# Altium PCB MATRIX-x4.PcbDoc
Units mil, origin at the board's own origin, x right, y up, seen from the top; angles counter-clockwise.
Board outline 5538 x 1391 mil, 2 copper layers (Top Layer, Bottom Layer); 23 components, 78 nets, 209 pads, 35 vias.
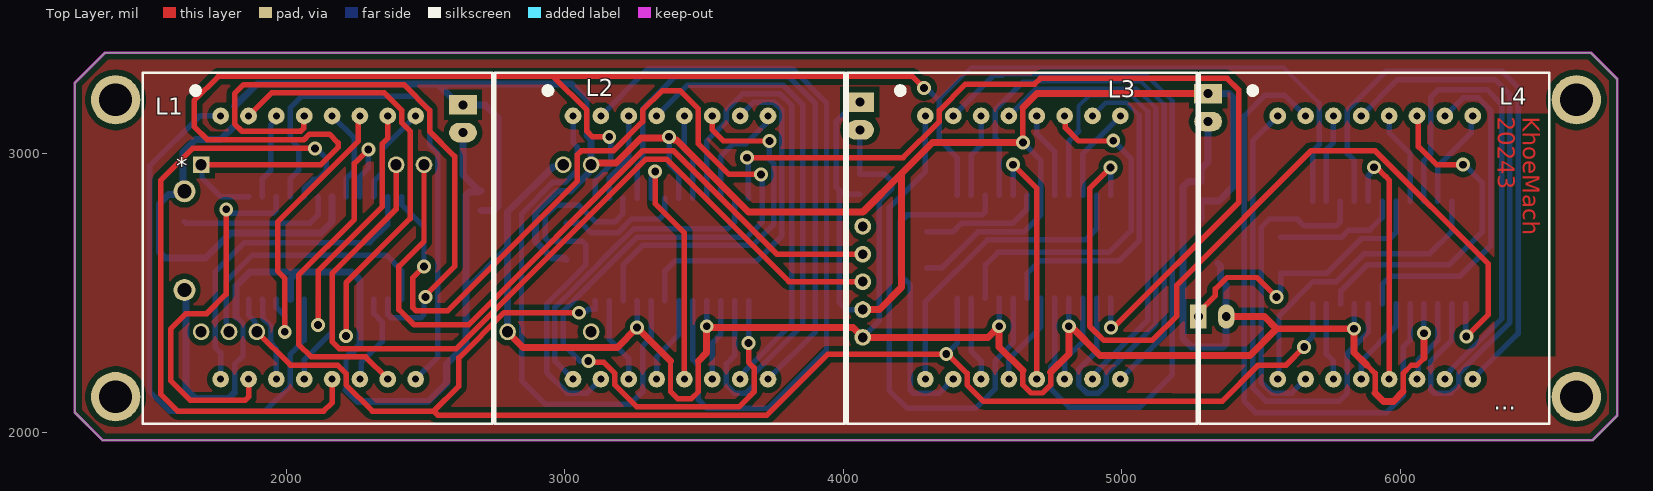
[diagram p0: Top Layer view]
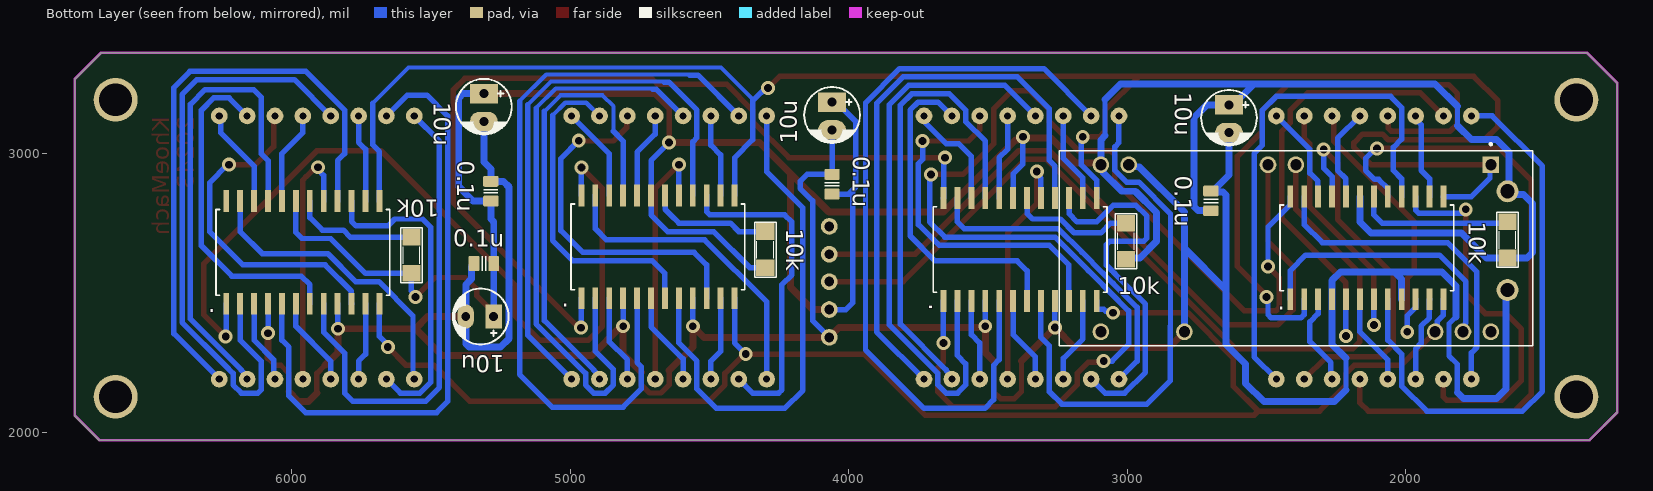
[diagram p1: Bottom Layer view, seen from below]
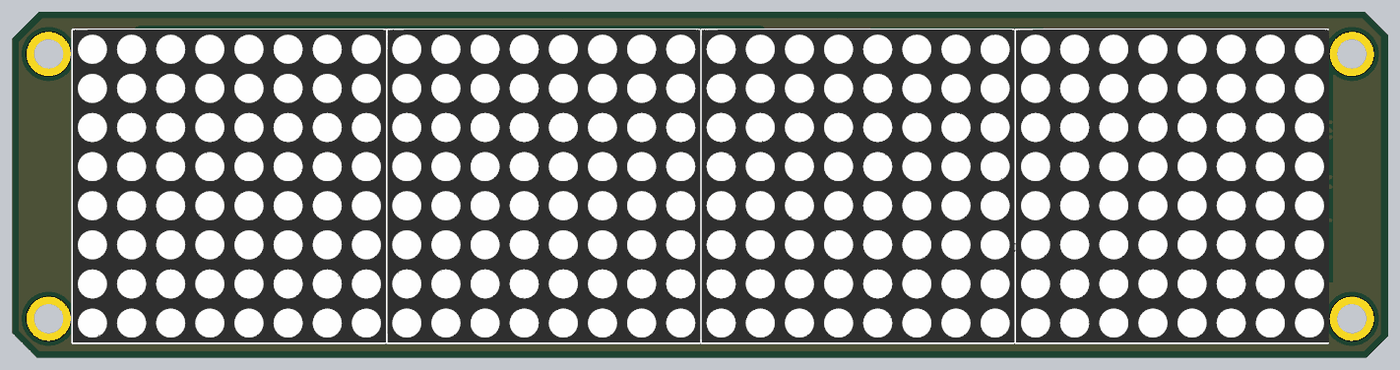
[diagram p2: 3D render of the assembled board from above, using the file's embedded part models]
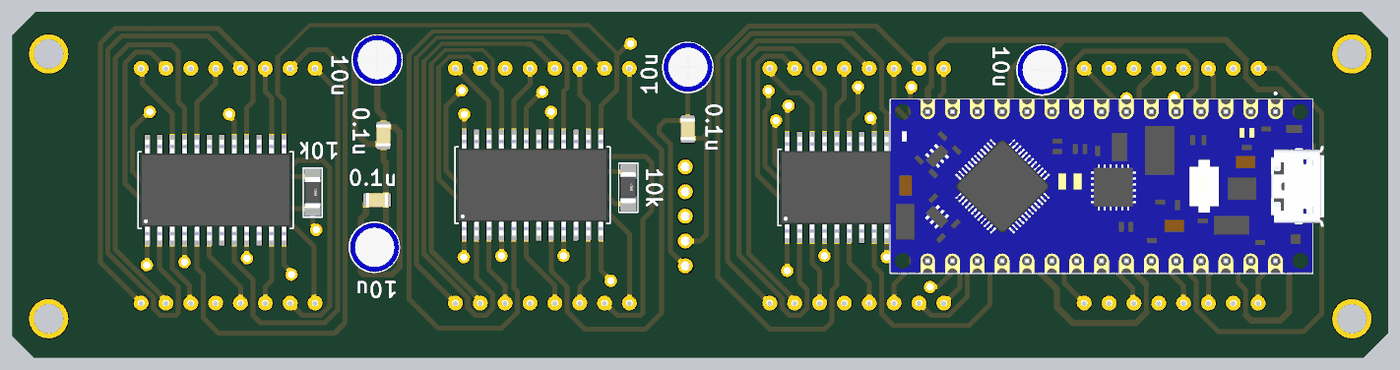
[diagram p3: 3D render of the assembled board from below, using the file's embedded part models]

## Layer stack, top to bottom
Top Solder: solder mask 0.4, Solder Resist, Dk 3.5
Top Layer: signal copper 1.4
Dielectric 1: dielectric 12.6, FR-4, Dk 4.8
Bottom Layer: signal copper 1.4
Bottom Solder: solder mask 0.4, Solder Resist, Dk 3.5

## Board outline
1341,1971 1241,2071 1241,3253 1350,3362 6684,3362 6779,3267 6779,2059 6691,1971

## Design rules (kind name [scope] priority, off if disabled: settings)
Clearance [All] p1: gap=10 ignorepadtopadclearanceinfootprint=FALSE except(20: Arc-Fill Arc-Poly Arc-Region Track-Fill Track-Poly Track-Region SMDPad-Fill SMDPad-Poly SMDPad-Region THPad-Fill THPad-Poly THPad-Region Via-Fill Via-Poly Via-Region Fill-Fill Fill-Poly Fill-Region Poly-Poly Poly-Region Region-Region)
PolygonConnect [All] p1: connectstyle=Relief reliefconductorwidth=10 reliefentries=4 polygonreliefangle="90 Angle" airgapwidth=10
RoutingVias [All] p1: holewidth=28 width=50 viastyle="Through Hole" minholewidth=19.68 minwidth=50 maxholewidth=28 maxwidth=50
SilkToSolderMaskClearance [IsText] p1: minsilkscreentomaskgap=10 clearancetoexposedcopper=TRUE
SolderMaskExpansion [All] p1: expansion=4 istentingtop=FALSE
Width [All] p1: maxlimit=39.37 minlimit=10 preferedwidth=19.68
29 further rules are at their usual default settings.

## Classes and differential pairs
component class MATRIX-x1: 0.1u 10k 10u * . L1 L2 L3 L4

## Components (designator, comment, footprint, x,y, rotation, side; value= is the part's Value field where it differs from the comment)
0.1u "approved sub OK" CAPC2012X135N 5285,2865 r90 bottom value=0.1uF (schematic designator C8)
0.1u "approved sub OK" CAPC2012X135N 5310,2605 r0 bottom value=0.1uF (schematic designator C6)
0.1u "approved sub OK" CAPC2012X135N 2700,2830 r90 bottom value=0.1uF (schematic designator C4)
0.1u "approved sub OK" CAPC2012X135N 4060,2890 r90 bottom value=0.1uF (schematic designator C2)
10k "10K" SM-RES-1206 4300,2720 r270 bottom value="R1/4W - 1K" (schematic designator R4)
10k "10K" SM-RES-1206 5570,2700 r270 bottom value="R1/4W - 1K" (schematic designator R3)
10k "10K" SM-RES-1206 1635,2755 r270 bottom value="R1/4W - 1K" (schematic designator R2)
10k "10K" SM-RES-1206 3005,2750 r270 bottom value="R1/4W - 1K" (schematic designator R1)
10u "10uF" CP1/2#1 5310,3215 r270 bottom (schematic designator C7)
10u "10uF" CP1/2#2 5275,2415 r0 bottom (schematic designator C5)
10u "10uF" CP1/2#1 2635,3175 r270 bottom (schematic designator C3)
10u "10uF" CP1/2#1 4060,3185 r270 bottom (schematic designator C1)
* "module- mini360" MODULE-MINI360 1930,2685 r0 top
. "MAX7219" MAX7219 5960,2650 r90 bottom (schematic designator M4)
. "MAX7219" MAX7219 4685,2670 r90 bottom (schematic designator M3)
. "MAX7219" MAX7219 3385,2660.5 r90 bottom (schematic designator M2)
. "MAX7219" MAX7219 2140,2666.03 r90 bottom (schematic designator M1)
A1 "ARDUINO-NANO" ARDUINO-NANO 2385,2675 r0 bottom
D1 "DS1307" DS1307-MODULE 4581.81,2576.22 r180 bottom
L1 "LEDMATRIX-8X8" LEDMATRIX_8X8 2095,2670 r0 top
L2 "LEDMATRIX-8X8" LEDMATRIX_8X8 3360,2670.12 r0 top
L3 "LEDMATRIX-8X8" LEDMATRIX_8X8 4625,2670.12 r0 top
L4 "LEDMATRIX-8X8" LEDMATRIX_8X8 5890,2670.12 r0 top

## Footprints (in the part's own frame and the unit in brackets; to place one, negate y for a bottom-side part, rotate by r counter-clockwise, add the part's x,y. Pads: shape width x height; smd on the part's side, far side on the other; paste and mask are expansions set on the pad)
ARDUINO-NANO [mil]
  rect 60x60 / inner round 60 / far side rect 60x60 hole 40: 1(-690,-285)
  round 60 hole 40: 8(10,-285) 9(110,-285) 14(610,-285) 15(710,-285) 16(710,315) 19(410,315) 28(-490,315) 29(-590,315) 30(-690,315)
  silkscreen extent -840,-363 860,365, body extent -885,-335 860,365, height 236
CAPC2012X135N [mm] "Chip Capacitor, Body 2.0x1.2mm, EIA 0805, IPC Medium Density"
  round 0.254 on Mech15: 0(0,0)
  rrect25% 1x1.4 smd: 1(-0.9,0) 2(0.9,0)
  Top Layer pour cut-out: -0.675,0.7 -0.475,0.9 0.475,0.9 0.675,0.7 0.675,-0.7 0.475,-0.9 -0.475,-0.9 -0.675,-0.7
  silkscreen extent -0.15,-0.65 0.15,0.65, body extent -1.1,-0.72 1.1,0.73, height 1.34
CP1/2#1 [mil]
  rect 70x100 hole 32: 1(0,0)
  oval 70x100 hole 32: 2(100,0)
  silkscreen extent -53,-100 146,100, body extent -54,-99 144,100, height 296
CP1/2#2 [mil]
  rect 59.06x86.61 hole 32: 1(0,0)
  oval 59.06x86.61 hole 32: 2(100,0)
  silkscreen extent -53,-100 147,100, body extent -54,-99 144,100, height 296
DS1307-MODULE [mm]
  round 1.524 hole 0.9 mask+0.15: DS(13,4.12) GND(13,-6) SCL(13,1.58) SDA(13,-0.92) VCC(13,-3.46)
LEDMATRIX_8X8 [mil] "3mm"
  round 60 hole 25.59: C1(-30,464.88) C2(-130,-480) C3(-30,-480) C4(270,464.88) C5(170,-480) C6(170,464.88) C7(-230,464.88) C8(-330,464.88) R1(370,464.88) R2(-130,464.88) R3(370,-480) R4(70,464.88) R5(-330,-480) R6(270,-480) R7(-230,-480) R8(70,-480)
  silkscreen extent -610,-640 645,620, body extent -610,-639 650,621, height 239
MAX7219 [mil]
  rect 78x21 smd: 1(-189.5,275) 2(-189.5,225) 3(-189.5,175) 4(-189.5,125) 5(-189.5,75) 6(-189.5,25) 7(-189.5,-25) 8(-189.5,-75) 9(-189.5,-125) 10(-189.5,-175) 11(-189.5,-225) 12(-189.5,-275) 13(179.5,-275) 14(179.5,-225) 15(179.5,-175) 16(179.5,-125) 17(179.5,-75) 18(179.5,-25) 19(179.5,25) 20(179.5,75) 21(179.5,125) 22(179.5,175) 23(179.5,225) 24(179.5,275)
  silkscreen extent -159,-312 149,312, body extent -208,-303 198,303, height 104
MODULE-MINI360 [mm]
  round 2 hole 1.3 mask+0: 3(-7.493,4.555) 4(-7.493,-4.445)
SM-RES-1206 [mil]
  rect 60x65 smd: 1(0,0) 2(130,0)
  silkscreen extent -34,-38 164,39, body extent 2,-31 128,31, height 40

## Part data
0.1u 0.1u 0.1u 0.1u: library part "CAP C_0805", "Capacitor SMD Cer 1.8nF 10% 50V X7R 0805", Manufacturer 1="AVX Corporation", Manufacturer Part Number 1=08055C182KAT2A, Operating Temperature="-55°C ~ 125°C", Package / Case="0805 (2012 metric)", Ratings="50V; X7R", Supplier Part Number 1=478-1374-1-ND, Tolerance=±10%, SCDType=source*, Supplier 1=Digi-Key
10k 10k 10k 10k: library part R, "Resistor 1/4W"
10u 10u 10u 10u: library part "CAP hoa", "Cap"
D1: library part DS1307_MODULE

## Free pads (board coordinates)
  round 177.17 / inner round 157.48 / far side round 157.48 hole 118.11: ""(1388,2127) ""(1388,3193) ""(6632,2127) ""(6632,3193)

## Via types
v1: diameter 50, hole 28, Top Layer to Bottom Layer, 35 vias

## Nets (pads, with @x,y where several pads share a name; then routed paths per layer and width w, separated by ;. In a path a pad name is that pad's centre, name@x,y a point inside that pad or via, vN(x,y) a via of type N, cw(c..) or ccw(c..) an arc to the next point about the centre after c; other vN are vias at no path point)
5V: 0.1u.1 10k.2 10u.1 *.3 ..19 A1.15 D1.VCC | length 11419.6
  Top Layer w19: v1(4645,3040) 4645,3165
  Top Layer w19.68: 10u.1@5275,2415 5275,2428.78 5335.83,2489.61 5335.83,2513.85 5376.98,2555 5485,2555 v1(5555,2485)
  Top Layer w25: A1.15 3101.51,2966.51 3184.51,2966.51 3273.47,3055.47 3386.29,3055.47 3393.46,3048.31 3401.69,3048.31 3660,2790 4047.33,2790 4048.25,2790.93 4071.82,2790.93 4210,2929.1 ; D1.VCC 4130,2440 4210,2520 4210,2929.1 ; v1(4645,3040) 4320.9,3040 4210,2929.1 ; 4645,3165 4695,3215 10u.1@5310,3215
  Bottom Layer w19: 1814.84,3099.84 1814.84,3169.84 ; 3079.84,3064.16 3079.84,3194.16
  Bottom Layer w19.68: v1(3375,3060) 3375,2961.8 3410,2926.8 ..19@3410,2840 ; 0.1u.1@4060,2854.57 4000.43,2854.57 3985,2870 ; 10u.1@4060,3185 4045,3185 3975,3115 3975,2880 3985,2870 ; D1.VCC 4010,2440 3985,2465 3985,2870 ; 10k.2@4300,2590 4355,2590 4485,2720 4650,2720 4710,2780 4710,2849.5 4710,2975 v1(4645,3040) ; v1(5555,2485) 5555,2493.2 5570,2508.2 5570,2570 5735,2570 5860,2695 5963.47,2695 5985,2716.53 ..19@5985,2829.5
  Bottom Layer w25: 1814.84,3099.84 1765,3050 1675,3050 1630,3005 1630,2869.33 *.3 1623.7,2853.03 1578.03,2853.03 1545,2820 1545,2645 1565,2625 1635,2625 1710,2625 1800,2715 2125,2715 2165,2755 ..19@2165,2845.53 ; 1814.84,3169.84 1895,3250 2545,3250 ; 0.1u.1@2700,2794.57 2700.99,2795.56 2745.56,2795.56 2760,2810 2760,3130 2715,3175 2635,3175 2620,3175 2545,3250 ; 10k.2@3005,2620 2999.5,2625.5 2954.5,2625.5 2895,2685 2895,2788 2971.68,2864.68 3019.68,2864.68 3087.29,2932.29 3087.29,2952.29 A1.15 3095,3049 3079.84,3064.16 ; 3079.84,3194.16 3024,3250 2545,3250 ; 10u.1@5275,2415 5274.57,2415.43 5274.57,2605 5274.57,2754.57 5285,2765 5285,2829.57 5348.47,2829.57 5400.31,2881.41 5400.31,3199.68 5385,3215 10u.1@5310,3215
A1: ..14@1915,2845.53 L1.R2 | length 310.1
  Bottom Layer w19.68: ..14@1915,2845.53 1915,2909.51 1944.84,2939.35 1944.84,2995.33 1945,2995.49 1945,3103.97 1965,3123.97 L1.R2
A2: ..14@3160,2840 L2.R2 | length 324
  Bottom Layer w19.68: ..14@3160,2840 3160.66,2840.66 3160.66,2913.19 3230,2982.53 L2.R2
A3: ..14@4460,2849.5 L3.R2 | length 300
  Bottom Layer w19.68: ..14@4460,2849.5 4460,2995 4495,3030 L3.R2
A4: ..14@5735,2829.5 L4.R2 | length 315.9
  Bottom Layer w19.68: ..14@5735,2829.5 5735,3015 5760,3040 L4.R2
B1: ..16@2015,2845.53 L1.R3 | length 1892
  Bottom Layer w19.68: ..16@2015,2845.53 2015,2909.51 2044.84,2939.35 2044.84,3022.43 2015.16,3052.12 2015.16,3165.16 2055,3205 2465.37,3205 2514.84,3155.53 2514.84,3155.16 2515,3155 2515,3030 2544.84,3000.16 2544.84,2269.84 L1.R3
B2: ..16@3260,2840 L2.R3 | length 2095.6
  Bottom Layer w19.68: ..16@3260,2840 3260,2955 3280,2975 3280,3160 3395,3275 3805,3275 3900,3180 3900,2360.12 L2.R3
B3: ..16@4560,2849.5 L3.R3 | length 2047.5
  Bottom Layer w15: 4662.41,3256.66 4664.75,3259 5069.04,3259 5152.31,3175.73
  Bottom Layer w19.68: ..16@4560,2849.5 4560,3042.21 4545.16,3057.06 4545.16,3155.65 4646.17,3256.66 4662.41,3256.66 ; L3.R3 5152.31,2347.43 5152.31,3175.73
B4: ..16@5835,2829.5 L4.R3 | length 2145.5
  Bottom Layer w19.68: ..16@5835,2829.5 5835,2975 5810,3000 5810,3155.49 5949.2,3294.68 6365.32,3294.68 6423.23,3236.77 6423.23,2353.35 L4.R3
C1: ..20@2215,2845.53 L1.R4 | length 334.8
  Bottom Layer w19.68: L1.R4 2244.84,3055.04 2244.84,2939.35 2215,2909.51 ..20@2215,2845.53
C2: ..20@3460,2840 L2.R4 | length 307.4
  Bottom Layer w19.68: L2.R4 3430,3015 3460,2985 ..20@3460,2840
C3: ..20@4760,2849.5 L3.R4 | length 312.4
  Bottom Layer w19.68: L3.R4 4695,3070 4760,3005 ..20@4760,2849.5
C4: ..20@6035,2829.5 L4.R4 | length 336.6
  Bottom Layer w19.68: L4.R4 5960,3075 6035,3000 ..20@6035,2829.5
CLK: ..13 A1.1 | length 6953.2
  Top Layer w19.68: A1.1 2125,2960 2186.85,3021.85 2186.85,3038.15 2155,3070 2083.99,3070 2063.51,3049.53 1717,3049.53 1670,3096.53 1670,3190 1757,3277 2958.49,3277 ; v1(3160,3060) 3100,3060 3080,3080 3080,3155.49 2958.49,3277 ; v1(4290,3235) 4248,3277 2958.49,3277
  Bottom Layer w15: 4345.16,3195.16 4459,3309 5581,3309 5709.84,3180.16
  Bottom Layer w19.68: A1.1 1698,2957 1698,2912 1764.47,2845.53 ..13@1865,2845.53 ; ..13@3110,2840 3110,2904.51 3165,2959.51 3165,3055 v1(3160,3060) ; v1(4290,3235) 4298.2,3235 4312.57,3220.63 4313.37,3220.63 4338.84,3195.16 4345.16,3195.16 4345.16,3049.57 4410,2984.73 ..13@4410,2849.5 ; ..13@5685,2829.5 5685,3006.98 5709.84,3031.82 5709.84,3180.16
D1: ..23@2365,2845.53 L1.R5 | length 1184.1
  Bottom Layer w19.68: L1.R5 1765,2284.71 1745.16,2304.56 1745.16,2575.16 1850,2680 2300,2680 2365,2745 ..23@2365,2845.53
D2: ..23@3610,2840 L2.R5 | length 1141.7
  Bottom Layer w19.68: L2.R5 2965,2255.12 2965,2447.46 3051.06,2533.52 3087.03,2569.49 3163.23,2645.69 3247.23,2729.68 3584.68,2729.68 3610,2755 ..23@3610,2840
D3: ..23@4910,2849.5 L3.R5 | length 1120.9
  Bottom Layer w19.68: L3.R5 4295,2468.02 4517.3,2690.32 4870.31,2690.32 4910,2730 ..23@4910,2849.5
D4: ..23@6185,2829.5 L4.R5 | length 1084.6
  Bottom Layer w19.68: L4.R5 5564.5,2194.62 5564.5,2417.56 5687.25,2540.32 5770.31,2540.32 5870.24,2640.24 6105.24,2640.24 6185,2720 ..23@6185,2829.5
DIG01: ..2@2365,2476.53 L1.C1 | length 2178.8
  Top Layer w19.68: L1.C1 2063.54,3133.42 2063.54,3091.53 2052,3080 1841.69,3080 1815.16,3106.53 1815.16,3215.16 1847.32,3247.32 2423.05,3247.32 2515,3155.37 2515,3080 2605,2990 2605,2595 2499.84,2489.84 v1(2499.84,2485)
  Bottom Layer w19.68: ..2@2365,2476.53 2365.66,2475.87 2365.66,2421.53 2377.19,2410 2483.47,2410 2495,2421.53 2495,2480.16 v1(2499.84,2485)
DIG02: ..2@3610,2471 L2.C1 | length 2115.4
  Bottom Layer w19.68: L2.C1 3440,3245 3785.45,3245 3854.68,3175.76 3854.68,2385.29 3680.16,2210.76 3680.16,2169.79 3650.65,2140.28 3609.35,2140.28 3580.16,2169.47 3580.16,2245.16 3610,2275 ..2@3610,2471
DIG03: ..2@4910,2480.5 L3.C1 | length 2127.2
  Bottom Layer w15: 4703.21,3231.66 4705.56,3234 5052.06,3234 5122.63,3163.43
  Bottom Layer w19.68: L3.C1 4691.66,3231.66 4703.21,3231.66 ; ..2@4910,2480.5 4910,2290 4845.16,2225.16 4845.16,2169.47 4874.35,2140.28 4915.65,2140.28 4945.16,2169.79 4945.16,2210.76 5122.63,2388.24 5122.63,3163.43
DIG04: ..2@6185,2460.5 L4.C1 | length 2184.3
  Bottom Layer w19.68: L4.C1 5990,3265 6340,3265 6393.55,3211.45 6393.55,2393.55 6239.96,2239.96 6239.35,2239.96 6210.16,2210.76 6210.16,2169.79 6180.65,2140.28 6121.69,2140.28 6110.16,2151.81 6110.16,2255.16 6185,2330 ..2@6185,2460.5
DIG11: ..11@1915,2476.53 L1.C2 | length 307.2
  Bottom Layer w19.68: ..11@1915,2476.53 1915.66,2475.87 1915.66,2409.83 1945.16,2380.33 1945.16,2318.98 1965,2299.14 L1.C2
DIG12: ..11@3160,2471 L2.C2 | length 309.9
  Bottom Layer w19.68: ..11@3160,2471 3160,2335 3230,2265 L2.C2
DIG13: ..11@4460,2480.5 L3.C2 | length 304.9
  Bottom Layer w19.68: ..11@4460,2480.5 4460,2290 4495,2255 L3.C2
DIG14: ..11@5735,2460.5 L4.C2 | length 280.7
  Bottom Layer w19.68: ..11@5735,2460.5 5735,2280 5760,2255 L4.C2
DIG21: ..6@2165,2476.53 L1.C3 | length 327.9
  Bottom Layer w19.68: L1.C3 2065,2259.51 2165,2359.51 ..6@2165,2476.53
DIG22: ..6@3410,2471 L2.C3 | length 314
  Bottom Layer w19.68: L2.C3 3330,2270 3410,2350 ..6@3410,2471
DIG23: ..6@4710,2480.5 L3.C3 | length 338
  Bottom Layer w19.68: L3.C3 4595,2263.02 4710,2378.02 ..6@4710,2480.5
DIG24: ..6@5985,2460.5 L4.C3 | length 322.2
  Bottom Layer w19.68: L4.C3 5860,2255 5985,2380 ..6@5985,2460.5
DIG31: ..7@2115,2476.53 L1.C4 | length 945.6
  Top Layer w19.68: v1(2114.78,2384.78) 2114.78,2578.78 2344.84,2808.84 2344.84,3034.84 2365,3055 L1.C4
  Bottom Layer w19.68: v1(2114.78,2384.78) 2114.89,2384.89 2114.89,2476.41 ..7@2115,2476.53
DIG32: ..7@3360,2471 L2.C4 | length 1213.4
  Bottom Layer w19.68: ..7@3360,2471 3360,2579.02 3395.98,2615 3690,2615 3779.84,2704.84 3779.84,3155.65 3750.65,3184.84 3679.84,3184.84 L2.C4
DIG33: ..7@4660,2480.5 L3.C4 | length 1197.4
  Bottom Layer w15: L3.C4 4942.5,3182.5 5017.99,3182.5 5063.26,3137.23
  Bottom Layer w19.68: ..7@4660,2480.5 4660,2570 4705,2615 4990,2615 5063.26,2688.26 5063.26,3137.23
DIG34: ..7@5935,2460.5 L4.C4 | length 1212.2
  Bottom Layer w19.68: ..7@5935,2460.5 5935,2529.03 5965.97,2560 6215,2560 6324.69,2669.68 6324.69,3155.32 6280,3200 6225,3200 L4.C4
DIG41: ..3@2315,2476.53 L1.C5 | length 332
  Bottom Layer w19.68: L1.C5 2269.53,2194.53 2269.53,2249.53 2344.84,2324.84 2344.84,2395.65 2315.42,2425.06 2315.42,2476.1 ..3@2315,2476.53
DIG42: ..3@3560,2471 L2.C5 | length 293.3
  Bottom Layer w19.68: L2.C5 3530,2320 3560,2350 ..3@3560,2471
DIG43: ..3@4860,2480.5 L3.C5 | length 317.3
  Bottom Layer w19.68: L3.C5 4795,2260 4860,2325 ..3@4860,2480.5
DIG44: ..3@6135,2460.5 L4.C5 | length 301.4
  Bottom Layer w19.68: L4.C5 6064.69,2194.8 6064.69,2259.68 6135,2330 ..3@6135,2460.5
DIG51: ..10@1965,2476.53 L1.C6 | length 1037
  Top Layer w19.68: v1(1995,2360) 1995,2553.09 1969.23,2578.86 1969.23,2754.23 2259.79,3044.79 2259.79,3129.67 L1.C6
  Bottom Layer w19.68: ..10@1965,2476.53 1965,2448.03 1995,2418.03 v1(1995,2360)
DIG52: ..10@3210,2471 L2.C6 | length 1306.7
  Top Layer w19.68: L2.C6 3530,3085 3570,3045 v1(3735,3045)
  Bottom Layer w19.68: ..10@3210,2471 3210,2600 3280,2670 3675,2670 3749.84,2744.84 3749.84,2964.19 3735,2979.03 v1(3735,3045)
DIG53: ..10@4510,2480.5 L3.C6 | length 1278.9
  Top Layer w19.68: L3.C6 4797.41,3132.59 4797.41,3092.59 4845,3045 4968.42,3045 v1(4969.48,3046.07)
  Bottom Layer w19.68: ..10@4510,2480.5 4510,2600 4555,2645 4955,2645 5033.57,2723.57 5033.57,2981.97 v1(4969.48,3046.07)
DIG54: ..10@5785,2460.5 L4.C6 | length 1214.5
  Top Layer w19.68: L4.C6 6065,3130 6065,3025 6130,2960 v1(6225,2960)
  Bottom Layer w19.68: ..10@5785,2460.5 5785.66,2461.16 5785.66,2505.66 5880,2600 6175,2600 6295,2720 6295,2895 6230,2960 v1(6225,2960)
DIG61: ..5@2215,2476.53 L1.C7 | length 1659.7
  Top Layer w19.68: L1.C7 1947.75,3217.63 2352.74,3217.63 2414.84,3155.53 2414.84,3110.65 2445,3080.49 2445,2766.12 2215,2536.12 v1(2215,2345)
  Bottom Layer w19.68: v1(2215,2345) ..5@2215,2476.53
DIG62: ..5@3460,2471 L2.C7 | length 2740.9
  Bottom Layer w19.68: L2.C7 3299.68,3304.68 3817.3,3304.68 3940,3181.98 3940,2295 3730,2085 3511.53,2085 3480.16,2116.37 3480.16,2239.84 3460,2260 ..5@3460,2471
DIG63: ..5@4760,2480.5 L3.C7 | length 2713.5
  Bottom Layer w15: 4570.45,3281.66 4572.8,3284 5086.02,3284 5182,3188.02
  Bottom Layer w19.68: L3.C7 4541.66,3281.66 4570.45,3281.66 ; ..5@4760,2480.5 4760,2250 4745.16,2235.16 4745.16,2154.84 4810,2090 5065,2090 5182,2207 5182,3188.02
DIG64: ..5@6035,2460.5 L4.C7 | length 2259.4
  Bottom Layer w19.68: L4.C7 5585,3210 5515,3210 5440,3135 5440,2110 5480,2070 5950,2070 6010,2130 6010,2305 6035,2330 ..5@6035,2460.5
DIG71: ..8@2065,2476.53 L1.C8 | length 2042.2
  Bottom Layer w19.68: L1.C8 1764.88,3135 1690,3135 1510,2955 1510,2146.53 1581.53,2075 1925,2075 2015.16,2165.16 2015.16,2280.16 2065,2330 ..8@2065,2476.53
DIG72: ..8@3310,2471 L2.C8 | length 1892.2
  Bottom Layer w19.68: L2.C8 3030,3039.14 3044.84,3024.3 3044.84,3003.06 3045,3002.91 3045,2939.51 3002.52,2897.03 2958.29,2897.03 2845,2783.74 2845,2380.49 2845.16,2380.33 2845.16,2184.84 2930,2100 3235,2100 3279.84,2144.84 3279.84,2309.84 3310,2340 ..8@3310,2471
DIG73: ..8@4610,2480.5 L3.C8 | length 1827.2
  Bottom Layer w19.68: L3.C8 4295,2935 4165,2805 4165,2150 4230,2085 4475,2085 4545.16,2155.16 4545.16,2255.16 4610,2320 ..8@4610,2480.5
DIG74: ..8@5885,2460.5 L4.C8 | length 1736.8
  Bottom Layer w19.68: L4.C8 5469.69,3044.68 5469.69,2160.32 5519.41,2110.59 5780.59,2110.59 5809.84,2139.84 5809.84,2283.32 5885,2358.47 ..8@5885,2460.5
DIN1: ..1@2415,2476.53 A1.29 | length 979.7
  Bottom Layer w19.68: A1.29 1787.29,2367.71 1787.29,2389.4 1785,2391.69 1785,2540 1880,2635 2360,2635 2415,2580 ..1@2415,2476.53
DIN2: ..1@3660,2471 ..24@2415,2845.53 | length 4606.6
  Top Layer w19.68: v1(2495,2595) 2455,2555 2455,2446.53 2466.53,2435 2580,2435 3044.84,2899.84 3044.84,2994.84 3060,3010 3175.49,3010 3280,3114.51 3280,3155.49 3349.51,3225 3415,3225 3480,3160 3480,3035 3590,2925 v1(3705,2925) ; v1(3085,2255) 3088.92,2251.08 3139.53,2251.08 3180.16,2210.45 3180.16,2169.47 3259.32,2090.32 3625.32,2090.32 3665,2130 3679.84,2144.84 3679.84,2230.71 3660,2250.56 v1(3660,2320)
  Bottom Layer w19.68: ..24@2415,2845.53 2415,2817.03 2495,2737.03 v1(2495,2595) ; v1(3085,2255) 3055,2255 2995,2315 2995,2435.48 3063.36,2503.83 3116.71,2557.19 3139.52,2580 3259.52,2700 3655,2700 3710,2755 3710,2920 v1(3705,2925) ; v1(3660,2320) ..1@3660,2471
DIN3: ..1@4960,2480.5 ..24@3660,2840 | length 3226
  Top Layer w19.68: v1(3655,2985.16) 3655.16,2985 4215.49,2985 4344.84,3114.35 4344.84,3155.33 4438.51,3249 4687.02,3249 4707.86,3269.84 5378.63,3269.84 5420,3228.47 5420,2825 4969.84,2374.84 v1(4961.71,2374.84)
  Bottom Layer w19.68: v1(3655,2985.16) 3659.34,2980.82 3659.34,2840.66 ..24@3660,2840 ; ..1@4960,2480.5 4960.66,2479.84 4960.66,2375.89 v1(4961.71,2374.84)
DIN4: ..1@6235,2460.5 ..24@4960,2849.5 | length 3078.8
  Top Layer w19.68: v1(4960,2950) 4885,2875 4885,2380 4935,2330 5110,2330 5197.5,2417.5 5197.5,2527.5 5680,3010 5910,3010 6315,2605 6315,2421 v1(6237,2343)
  Bottom Layer w19.68: ..24@4960,2849.5 v1(4960,2950) ; ..1@6235,2460.5 6235.66,2459.84 6235.66,2344.34 v1(6237,2343)
DP1: ..22@2315,2845.53 L1.R1 | length 351.5
  Bottom Layer w19.68: ..22@2315,2845.53 2315.66,2846.18 2315.66,2900.66 2345,2930 2345,3014.88 L1.R1
DP2: ..22@3560,2840 L2.R1 | length 391.8
  Bottom Layer w19.68: ..22@3560,2840 3560,2990 3605,3035 3650,3035 3722.29,3107.29 3722.29,3127.29 L2.R1
DP3: ..22@4860,2849.5 L3.R1 | length 341.4
  Bottom Layer w19.68: ..22@4860,2849.5 4860,3000 L3.R1
DP4: ..22@6135,2829.5 L4.R1 | length 357.3
  Bottom Layer w19.68: ..22@6135,2829.5 6135,2955 6255.47,3075.47 6255.47,3130.47 L4.R1
E1: ..21@2265,2845.53 L1.R6 | length 1357.2
  Top Layer w19.68: v1(2295,3015) 2244.84,2964.84 2244.84,2763.8 2045,2563.96 2045,2315 2090.32,2269.68 2285.32,2269.68 L1.R6
  Bottom Layer w19.68: ..21@2265,2845.53 2265,2917.53 2295,2947.53 v1(2295,3015)
E2: ..21@3510,2840 L2.R6 | length 1680.9
  Bottom Layer w19.68: ..21@3510,2840 3510,3044.51 3580.16,3114.67 3580.16,3155.65 3639.04,3214.53 3773.94,3214.53 3815,3173.47 3815,2387.59 3650.47,2223.06 3650.47,2221.5 3630,2201.03 L2.R6
E3: ..21@4810,2849.5 L3.R6 | length 1666.1
  Bottom Layer w15: 4845,3080 4845,3170 4884,3209 5035.08,3209 5092.94,3151.14
  Bottom Layer w19.68: ..21@4810,2849.5 4810,3045 4845,3080 ; L3.R6 4895,2201.03 4915.47,2221.5 4915.47,2223.06 5092.94,2400.53 5092.94,3151.14
E4: ..21@6085,2829.5 L4.R6 | length 1741.7
  Bottom Layer w19.68: ..21@6085,2829.5 6085,2975 6110,3000 6110,3203 6136.69,3229.68 6310.76,3229.68 6363.86,3176.59 6363.86,2406.45 6180.47,2223.06 6180.47,2221.5 6160,2201.03 L4.R6
F1: ..15@1965,2845.53 L1.R7 | length 1359.4
  Top Layer w19.68: v1(1785,2799.84) 1785,2495 1715,2425 1640,2425 1585,2370 1585,2185 1655,2115 1853.47,2115 1865,2126.53 L1.R7
  Bottom Layer w19.68: v1(1785,2799.84) 1799.84,2785 1953.47,2785 1965,2796.53 ..15@1965,2845.53 ; L1.R7@1864.58,2189.58 L1.R7
F2: ..15@3210,2840 L2.R7 | length 1385.1
  Bottom Layer w19.68: L2.R7 3080.16,2140.28 3009.35,2140.28 2935,2214.63 2935,2459.44 3045.72,2570.16 3057.34,2581.78 3075,2599.44 3075,2673.47 3063.47,2685 2941.53,2685 2930,2696.53 2930,2775 2970,2815 3050,2815 3110,2755 3180,2755 3209.34,2784.34 3209.34,2839.34 ..15@3210,2840
F3: ..15@4510,2849.5 L3.R7 | length 1176.5
  Bottom Layer w19.68: L3.R7 4345.16,2140.28 4251.53,2140.28 4240,2151.81 4240,2529.44 4204.69,2564.75 4204.69,2754.68 4230,2780 4498.47,2780 4510,2791.53 ..15@4510,2849.5
F4: ..15@5785,2829.5 L4.R7 | length 1139.9
  Bottom Layer w19.68: L4.R7 5610.16,2140.28 5539.35,2140.28 5500,2179.63 5500,2735 5530,2765 5630,2765 5655,2740 5768.47,2740 5785,2756.53 ..15@5785,2829.5
G1: ..17@2065,2845.53 L1.R8 | length 2343.8
  Top Layer w19.68: v1(2103.29,3018.29) 2101.74,3019.84 1664.84,3019.84 1550,2905 1550,2135 1610,2075 2135,2075 2165,2105 L1.R8
  Bottom Layer w19.68: ..17@2065,2845.53 2065,2874.03 2097.99,2907.02 2112.51,2907.02 2144.84,2939.35 2144.84,2982.73 2109.28,3018.29 v1(2103.29,3018.29)
G2: ..17@3310,2840 L2.R8 | length 889.9
  Top Layer w19.68: v1(3325,2935.16) 3325,2820 3430,2715 L2.R8
  Bottom Layer w19.68: ..17@3310,2840 3310,2911.95 3325,2926.95 v1(3325,2935.16)
G3: ..17@4610,2849.5 L3.R8 | length 915.6
  Top Layer w19.68: v1(4610,2960) 4695,2875 L3.R8
  Bottom Layer w19.68: ..17@4610,2849.5 v1(4610,2960)
G4: ..17@5885,2829.5 L4.R8 | length 918
  Top Layer w19.68: v1(5905.79,2950.79) 5913.99,2950.79 5945.87,2918.92 5946.08,2918.92 5960,2905 L4.R8
  Bottom Layer w19.68: ..17@5885,2829.5 5885,2921.8 5905.79,2942.59 v1(5905.79,2950.79)
GND: 0.1u.2 10u.2 *.4 ..4 ..9 A1.14 A1.19 D1.GND | length 11859
  Top Layer w19: 3379.84,2255.16 3379.84,2145.16 3405,2120 3455,2120 3479.84,2144.84 3479.84,2254.84 ; 4645,2220.9 4645,2169.63 4674.35,2140.28 4715.65,2140.28 4744.84,2169.47 4744.84,2214.84 ; 5880.65,2239.96 5909.84,2210.76 5909.84,2140.16 ; 6010.16,2145.16 6010.16,2210.76 6039.39,2240 6060,2240 6085.79,2265.79
  Top Layer w25: A1.19 2851,2304 3189,2304 v1(3260,2375) 3379.84,2255.16 ; 3479.84,2254.84 3510,2285 v1(3510,2380) 3515,2375 4035,2375 D1.GND 4520,2340 v1(4560,2380) 4560,2305.9 4645,2220.9 ; 4744.84,2214.84 4810,2280 v1(4810,2380) 4817.14,2380 4922.14,2275 5460,2275 5555.95,2370.95 ; 10u.2@5375,2415 5511.89,2415 5555.95,2370.95 ; 5880.65,2239.96 5880.04,2239.96 5834.05,2285.95 v1(5834.05,2370.95) 5555.95,2370.95 ; 5909.84,2140.16 5940,2110 5975,2110 6010.16,2145.16 ; v1(6085,2355) 6085.79,2354.21 6085.79,2265.79
  Bottom Layer w19: 1815.16,2141.69 1815.16,2243.34 1845.16,2273.34 1845.16,2388.84 1820,2414 ; 2215.16,2151.72 2215.16,2265.16
  Bottom Layer w19.68: ..9@3259.34,2471.66 3260,2471 v1(3260,2375) ; v1(3510,2380) ..4@3510,2471 ; 10u.2@4060,3085 4060,2925.43 4149.57,2925.43 4175,2900 4175,2875 4130,2830 4130,2400 D1.GND ; v1(4560,2380) ..9@4560,2480.5 ; v1(4810,2380) ..4@4810,2480.5 ; v1(5834.05,2370.95) 5834.53,2371.42 5834.53,2460.03 ..9@5835,2460.5 ; v1(6085,2355) ..4@6085,2460.5
  Bottom Layer w25: *.4 1640,2505 1640,2155 1675,2120 1793.47,2120 1815.16,2141.69 ; 1820,2414 1820,2525 1870,2575 2040,2575 ; ..9@2015,2476.53 2015,2550 2040,2575 ; 2215.16,2151.72 2256.87,2110 2510,2110 2575,2175 2575,2245 2645.16,2315.16 2645.16,2510.16 ; 2215.16,2265.16 2265,2315 2265,2476.53 2265,2545 2235,2575 2040,2575 ; 10u.2@2635,3075 2635,2922.56 0.1u.2@2692.13,2865.43 ; 0.1u.2@2700,2865.43 0.1u.2@2692.13,2865.43 ; A1.19@2795,2375 2795,2660 ; A1.14 2987.59,2952.59 2957.59,2952.59 2795,2790 2795,2660 ; 10u.2@5310,3115 5310,2970 5285,2945 5285,2900.43 5284.01,2899.44 5239.44,2899.44 5219.06,2879.05 5219.06,2335.95 5250,2305 5363.47,2305 5375,2316.53 5375,2415 5375,2530 5355.28,2549.72 5355.28,2595.16 0.1u.2@5345.43,2605 ; 2645.16,2510.16 2795,2660 ; 2645.16,2510.16 2645,2510.32 2645,2850.62 2656.53,2862.15 2688.85,2862.15 0.1u.2@2692.13,2865.43
ISET1: 10k.1@1635,2755 ..18@2115,2845.53 | length 560
  Bottom Layer w19.68: 10k.1@1635,2755 1640,2750 2085,2750 2115,2780 ..18@2115,2845.53
ISET2: 10k.1@3005,2750 ..18@3360,2840 | length 453.5
  Bottom Layer w19.68: 10k.1@3005,2750 3060,2750 3095,2715 3190.56,2715 3240.56,2765 3340,2765 3359.34,2784.34 3359.34,2839.34 ..18@3360,2840
ISET3: 10k.1@4300,2720 ..18@4660,2849.5 | length 442.6
  Bottom Layer w19.68: 10k.1@4300,2720 4395,2720 4425,2750 4610,2750 4640.98,2780.98 4640.98,2781.66 4659.34,2800.02 4659.34,2848.84 ..18@4660,2849.5
ISET4: 10k.1@5570,2700 ..18@5935,2829.5 | length 453.5
  Bottom Layer w19.68: 10k.1@5570,2700 5790,2700 5814.69,2724.68 5889.69,2724.68 5935,2770 ..18@5935,2829.5
LOAD: ..12 A1.28 | length 5507.9
  Top Layer w19.68: A1.28 2015,2240 2175,2240 2175.16,2239.84 2185.65,2239.84 2215.16,2210.33 2215.16,2169.35 2309.51,2075 2530,2075 ; v1(3051.47,2428.53) 2782.49,2428.53 2620,2266.04 2620,2165 2530,2075 ; v1(5655,2305) 5589.96,2239.96 5489.96,2239.96 5360,2110 5178.05,2110 5177.46,2110.59 4504.04,2110.59 4445.16,2169.47 4445.16,2210.45 4385.61,2270 4380,2270 v1(4370,2280) 3945,2280 3725.63,2060.63 2544.37,2060.63 2530,2075
  Bottom Layer w19.68: ..12@1865,2476.53 1865,2420 1887.59,2397.41 1887.59,2367.41 A1.28 ; v1(3051.47,2428.53) 3057.27,2434.33 3077.38,2434.33 3084.89,2441.84 3109.34,2441.84 3110,2442.5 ..12@3110,2471 ; v1(4370,2280) 4410,2320 ..12@4410,2480.5 ; v1(5655,2305) 5655,2313.2 5685,2343.2 ..12@5685,2460.5
SCL: A1.9 D1.SCL | length 2657.9
  Top Layer w19.68: A1.9 2495,2685 2405,2595 2405,2440 2460,2385 2655,2385 3280,3010 3390,3010 3761.57,2638.43 D1.SCL
SDA: A1.8 D1.SDA | length 3110.1
  Top Layer w19.68: A1.8 2395,2800 2165,2570 2165,2325 2190.63,2299.37 2611.35,2299.37 3291.98,2980 3365,2980 3805,2540 D1.SDA
pads on no net: 0.1u.0 ..24@6235,2829.5 A1.16 A1.30 D1.DS

## Polygon pours and split planes (outlines as drawn)
no net on Top Layer "NONET_L01_P000" (solid, pour order 0): 1332,3344 1332,3343 1267,3278 1268,3277 1268,2043 1341,1970 1342,1971 6692,1971 6751,2030 6749,2032 6749,3296 6700,3345

## Keep-outs
Keep-Out Layer:
  the board outline again, w10

## Other copper
Top Layer:
  text "KhoeMach  / 20243" at 6349,3132.87 h60 r270

## Silkscreen, mask and mechanical layers (free items; w line width, h text height)
Top Overlay:
  text "..." at 6335,2080 h60